# Altium PCB MZCAT_backlight_board.PcbDoc
Units mm, origin at the board's own origin, x right, y up, seen from the top; angles counter-clockwise.
Board outline 35.08 x 126.7 mm, 2 copper layers (Top Layer, Bottom Layer); 51 components, 30 nets, 163 pads, 5 vias.
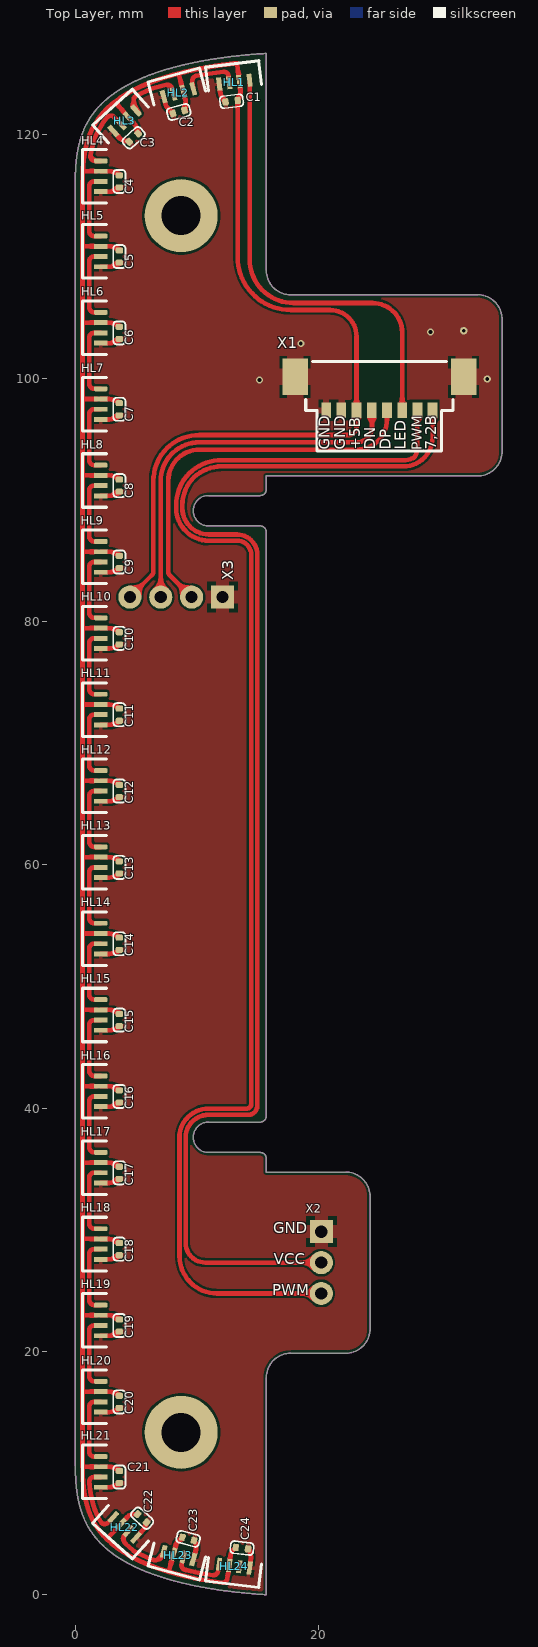
[diagram p0: Top Layer view]
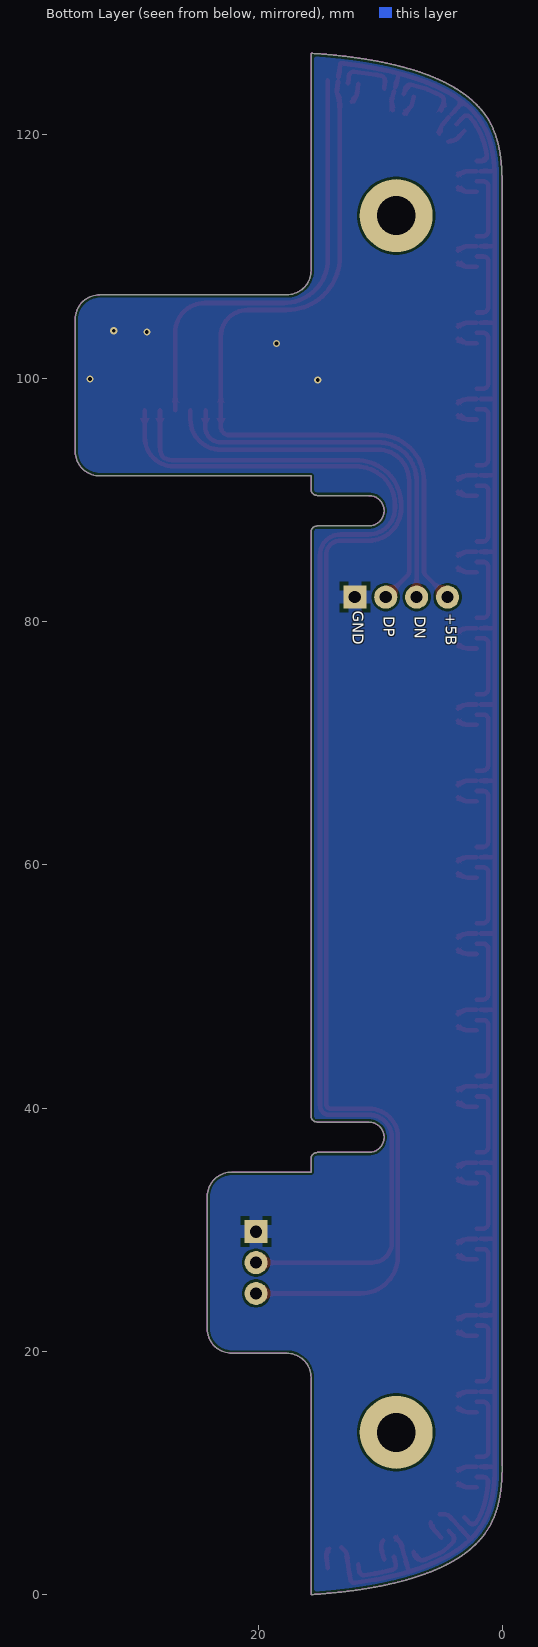
[diagram p1: Bottom Layer view, seen from below]
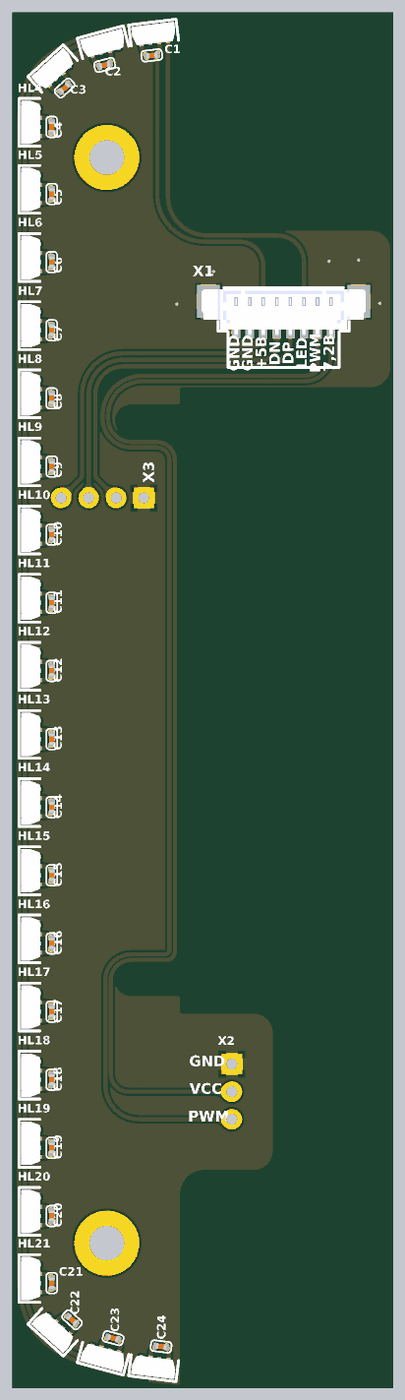
[diagram p2: 3D render of the assembled board from above, using the file's embedded part models]

## Layer stack, top to bottom
Top Solder: solder mask 0.0102, Solder Resist, Dk 3.5
Top Layer: signal copper 0.0356
Dielectric 1: dielectric 0.32, FR-4, Dk 4.8
Bottom Layer: signal copper 0.0356
Bottom Solder: solder mask 0.0102, Solder Resist, Dk 3.5

## Board outline
676 vertices, not listed, extent 0.006,0.006 35.086,126.702

## Design rules (kind name [scope] priority, off if disabled: settings)
AcuteAngle min_acute_angle [OnCopper] p1: minimum=3.50000000000000E+0001 checktracksonly=FALSE // Минимальный угол между примитивами топологии
BoardOutlineClearance board_outline_clearance_std [NOT (OnLayer('Bottom Overlay') OR OnLayer('Top Overlay'))] p1: gap=0.25 ignorepadtopadclearanceinfootprint=FALSE except(0: Arc-SplitContinuation Track-SplitContinuation SMDPad-SplitContinuation THPad-SplitContinuation Via-SplitContinuation Fill-SplitContinuation Poly-SplitContinuation Region-SplitContinuation Text-SplitContinuation) // Отступ элементов топологии от края фрезеруемой печатной платы
Clearance Clearance_keepout [OnTopLayer OR OnBottomLayer vs OnLayer('Keep-Out Layer')] p1: gap=0.125 ignorepadtopadclearanceinfootprint=FALSE except(0.2: Arc-Fill Arc-Poly Track-Fill Track-Poly SMDPad-SMDPad SMDPad-Fill SMDPad-Poly THPad-Fill THPad-Poly Via-Fill Via-Poly Fill-Fill Fill-Poly Poly-Poly Poly-Region Poly-Text; 0.25: Arc-Hole Track-Hole SMDPad-Hole THPad-Hole Via-Hole Fill-Hole Poly-Hole Region-Hole Text-Hole; 0.4: Arc-Track Track-Track)
Clearance TOP_BOT_GND [InPolygonClass('TOP_BOT')] p2: gap=0.5 ignorepadtopadclearanceinfootprint=FALSE
Clearance REF_GND [InPolygonClass('REF_GND')] p3: gap=0.5 ignorepadtopadclearanceinfootprint=FALSE
Clearance clearance_outer_18um_std [OnTopLayer OR OnBottomLayer] p4: gap=0.125 ignorepadtopadclearanceinfootprint=FALSE except(0.2: Arc-Fill Arc-Poly Track-Fill Track-Poly SMDPad-Fill SMDPad-Poly THPad-Fill THPad-Poly Via-Fill Via-Poly Fill-Fill Fill-Poly Poly-Poly Poly-Region Poly-Text; 0.25: Arc-Hole Track-Hole THPad-Hole Via-Hole Fill-Hole Poly-Hole Region-Hole Text-Hole) // Зазоры на внешних слоях
Clearance clearance_inner_18um_std [NOT (OnTopLayer Or OnBottomLayer)] p5: gap=0.125 ignorepadtopadclearanceinfootprint=FALSE except(0.2: Arc-Fill Arc-Poly Track-Fill Track-Poly SMDPad-SMDPad SMDPad-Fill SMDPad-Poly THPad-Fill THPad-Poly Via-Fill Via-Poly Fill-Fill Fill-Poly Poly-Poly Poly-Region Poly-Text; 0.25: Arc-Hole Track-Hole SMDPad-Hole THPad-Hole Via-Hole Fill-Hole Poly-Hole Region-Hole Text-Hole) // Зазоры на внутренних слоях
ComponentClearance [All] p1: gap=0 collisioncheckmode=3 verticalgap=0 showdistances=FALSE
DiffPairsRouting diff_pairs_routing [All] p1: maxlimit=0.127 minlimit=0.127 mostfreqgap=0.127 toplayer_minwidth=0.143 toplayer_maxwidth=0.143 toplayer_prefwidth=0.143 bottomlayer_minwidth=0.143 bottomlayer_maxwidth=0.143 bottomlayer_prefwidth=0.143 impedanceprofiledriven=TRUE maxuncoupledlength=12.7 // Правила трассировки дифференциальных пар
HoleSize min_hole_size_std [IsPad] p1: absolutevalues=TRUE maxlimit=5.9 minlimit=0.5 maxpercent=80.000 minpercent=20.000 // Диаметр межслойного переходного отверстия
HoleSize min_hole_size_via_std [IsVia] p2: absolutevalues=TRUE maxlimit=5.9 minlimit=0.3 maxpercent=80.000 minpercent=20.000 // Минимальный диаметр монтажного отверстия
HoleToHoleClearance hole_to_hole_clearance_std [All] p1: gap=0.2 allowstackedmicrovias=FALSE // Минимальное расстояние между краями двух отверстий
MinimumAnnularRing min_via_ar_std [All] p1: minimumring=0.15 // Поясок площадки переходного отверстия (Annular ring VIA)
MinimumAnnularRing min_pad_ar_std [All] p2: minimumring=0.2 // Поясок монтажной контактной площадки (Annular ring PAD)
MinimumSolderMaskSliver min_solder_mask_bridge_std [All] p1: minsoldermaskwidth=0 // Мнимальная ширина масочного мостика
PlaneClearance plane_clearance_18um_std [All] p1: clearance=0.2 // Отступ полигона (для слоя plane) от элементов топологии
PlaneConnect [All] p1: planeconnectstyle=Relief reliefexpansion=0.5 reliefentries=4 reliefconductorwidth=0.2 reliefairgap=0.2
PolygonConnect poly_connect_to_pad<=0.3 [(AsMM(PadXSize_AllLayers)<=0.301) or (AsMM(PadYSize_AllLayers)<=0.301)] p1: thpad.connectstyle=Relief thpad.reliefconductorwidth=0.2 thpad.reliefentries=4 thpad.polygonreliefangle="90 Angle" thpad.airgapwidth=0.2 smdpad.connectstyle=Relief smdpad.reliefconductorwidth=0.2 smdpad.reliefentries=4 smdpad.polygonreliefangle="90 Angle" smdpad.airgapwidth=0.2 via.connectstyle=Direct via.reliefconductorwidth=0.254 via.reliefentries=4 via.polygonreliefangle="90 Angle" via.airgapwidth=0.254 // Правила подключения полигонов для падов от 0,3мм и меньше
PolygonConnect poly_connect_to_pad<=0.4 [(AsMM(PadXSize_AllLayers)<=0.401) or (AsMM(PadYSize_AllLayers)<=0.401)] p2: thpad.connectstyle=Relief thpad.reliefconductorwidth=0.26 thpad.reliefentries=4 thpad.polygonreliefangle="90 Angle" thpad.airgapwidth=0.2 smdpad.connectstyle=Relief smdpad.reliefconductorwidth=0.26 smdpad.reliefentries=4 smdpad.polygonreliefangle="90 Angle" smdpad.airgapwidth=0.2 via.connectstyle=Direct via.reliefconductorwidth=0.254 via.reliefentries=4 via.polygonreliefangle="90 Angle" via.airgapwidth=0.254 // Правила подключения полигонов для падов от 0,4 и меньше
PolygonConnect poly_connect_to_pad<=0.6 [(AsMM(PadXSize_AllLayers)<=0.601) or (AsMM(PadYSize_AllLayers)<=0.601)] p3: thpad.connectstyle=Relief thpad.reliefconductorwidth=0.33 thpad.reliefentries=4 thpad.polygonreliefangle="90 Angle" thpad.airgapwidth=0.2 smdpad.connectstyle=Relief smdpad.reliefconductorwidth=0.33 smdpad.reliefentries=4 smdpad.polygonreliefangle="90 Angle" smdpad.airgapwidth=0.2 via.connectstyle=Direct via.reliefconductorwidth=0.254 via.reliefentries=4 via.polygonreliefangle="90 Angle" via.airgapwidth=0.254 // Правила подключения полигонов для падов от 0,6мм и меньше
PolygonConnect poly_connect_to_pad<=0.7 [(AsMM(PadXSize_AllLayers)<=0.701) or (AsMM(PadYSize_AllLayers)<=0.701)] p4: thpad.connectstyle=Relief thpad.reliefconductorwidth=0.46 thpad.reliefentries=4 thpad.polygonreliefangle="90 Angle" thpad.airgapwidth=0.2 smdpad.connectstyle=Relief smdpad.reliefconductorwidth=0.46 smdpad.reliefentries=4 smdpad.polygonreliefangle="90 Angle" smdpad.airgapwidth=0.2 via.connectstyle=Direct via.reliefconductorwidth=0.254 via.reliefentries=4 via.polygonreliefangle="90 Angle" via.airgapwidth=0.254 // Правила подключения полигонов для падов от 0,7мм и меньше
PolygonConnect poly_connect_to_pad<=0.8 [(AsMM(PadXSize_AllLayers)<=0.8)or(AsMM(PadYSize_AllLayers)<=0.8)] p5: thpad.connectstyle=Relief thpad.reliefconductorwidth=0.53 thpad.reliefentries=4 thpad.polygonreliefangle="90 Angle" thpad.airgapwidth=0.3 smdpad.connectstyle=Relief smdpad.reliefconductorwidth=0.53 smdpad.reliefentries=4 smdpad.polygonreliefangle="90 Angle" smdpad.airgapwidth=0.2 via.connectstyle=Direct via.reliefconductorwidth=0.254 via.reliefentries=4 via.polygonreliefangle="90 Angle" via.airgapwidth=0.254 // Правила подключения полигонов для падов от 0,8мм и меньше
PolygonConnect poly_connect_to_pad<=1 [(AsMM(PadXSize_AllLayers)<=1.01)or(AsMM(PadYSize_AllLayers)<=1.01)] p6: thpad.connectstyle=Relief thpad.reliefconductorwidth=0.6 thpad.reliefentries=4 thpad.polygonreliefangle="90 Angle" thpad.airgapwidth=0.3 smdpad.connectstyle=Relief smdpad.reliefconductorwidth=0.6 smdpad.reliefentries=4 smdpad.polygonreliefangle="90 Angle" smdpad.airgapwidth=0.2 via.connectstyle=Direct via.reliefconductorwidth=0.254 via.reliefentries=4 via.polygonreliefangle="90 Angle" via.airgapwidth=0.254 // Правила подключения полигонов для падов от 1мм и меньше
PolygonConnect poly_connect_to_pad<=1.3 [(AsMM(PadXSize_AllLayers)<=1.31)or(AsMM(PadYSize_AllLayers)<=1.31)] p7: thpad.connectstyle=Relief thpad.reliefconductorwidth=0.66 thpad.reliefentries=4 thpad.polygonreliefangle="90 Angle" thpad.airgapwidth=0.3 smdpad.connectstyle=Relief smdpad.reliefconductorwidth=0.86 smdpad.reliefentries=4 smdpad.polygonreliefangle="90 Angle" smdpad.airgapwidth=0.2 via.connectstyle=Direct via.reliefconductorwidth=0.254 via.reliefentries=4 via.polygonreliefangle="90 Angle" via.airgapwidth=0.254 // Правила подключения полигонов для падов от 1,3мм и меньше
PolygonConnect poly_connect_to_pad<=1.6 [(AsMM(PadXSize_AllLayers)<=1.61)or(AsMM(PadYSize_AllLayers)<=1.61)] p8: thpad.connectstyle=Relief thpad.reliefconductorwidth=0.8 thpad.reliefentries=4 thpad.polygonreliefangle="90 Angle" thpad.airgapwidth=0.3 smdpad.connectstyle=Relief smdpad.reliefconductorwidth=1 smdpad.reliefentries=4 smdpad.polygonreliefangle="90 Angle" smdpad.airgapwidth=0.2 via.connectstyle=Direct via.reliefconductorwidth=0.254 via.reliefentries=4 via.polygonreliefangle="90 Angle" via.airgapwidth=0.254 // Правила подключения полигонов для падов от 1,6мм и меньше
PolygonConnect poly_connect_to_pad<=1.8 [(AsMM(PadXSize_AllLayers)<=1.8)or(AsMM(PadYSize_AllLayers)<=1.8)] p9: thpad.connectstyle=Relief thpad.reliefconductorwidth=1 thpad.reliefentries=4 thpad.polygonreliefangle="90 Angle" thpad.airgapwidth=0.3 smdpad.connectstyle=Relief smdpad.reliefconductorwidth=1.2 smdpad.reliefentries=4 smdpad.polygonreliefangle="90 Angle" smdpad.airgapwidth=0.2 via.connectstyle=Direct via.reliefconductorwidth=0.254 via.reliefentries=4 via.polygonreliefangle="90 Angle" via.airgapwidth=0.254 // Правила подключения полигонов для падов от 1,8мм и меньше
PolygonConnect poly_connect_to_pad<=2 [(AsMM(PadXSize_AllLayers)<=2.01)or(AsMM(PadYSize_AllLayers)<=2.01)] p10: thpad.connectstyle=Relief thpad.reliefconductorwidth=1.1 thpad.reliefentries=4 thpad.polygonreliefangle="90 Angle" thpad.airgapwidth=0.3 smdpad.connectstyle=Relief smdpad.reliefconductorwidth=1.4 smdpad.reliefentries=4 smdpad.polygonreliefangle="90 Angle" smdpad.airgapwidth=0.2 via.connectstyle=Direct via.reliefconductorwidth=0.254 via.reliefentries=4 via.polygonreliefangle="90 Angle" via.airgapwidth=0.254 // Правила подключения полигонов для падов от 2мм и меньше
PolygonConnect poly_connect_to_pad<=2.3 [(AsMM(PadXSize_AllLayers)<=2.31)or(AsMM(PadYSize_AllLayers)<=2.31)] p11: thpad.connectstyle=Relief thpad.reliefconductorwidth=1.2 thpad.reliefentries=4 thpad.polygonreliefangle="90 Angle" thpad.airgapwidth=0.3 smdpad.connectstyle=Relief smdpad.reliefconductorwidth=1.4 smdpad.reliefentries=4 smdpad.polygonreliefangle="90 Angle" smdpad.airgapwidth=0.2 via.connectstyle=Direct via.reliefconductorwidth=0.254 via.reliefentries=4 via.polygonreliefangle="90 Angle" via.airgapwidth=0.254 // Правила подключения полигонов для падов от 2,3мм и меньше
PolygonConnect poly_connect_to_pad<=2.5 [(AsMM(PadXSize_AllLayers)<=2.51)or(AsMM(PadYSize_AllLayers)<=2.51)] p12: thpad.connectstyle=Relief thpad.reliefconductorwidth=1.2 thpad.reliefentries=4 thpad.polygonreliefangle="90 Angle" thpad.airgapwidth=0.3 smdpad.connectstyle=Relief smdpad.reliefconductorwidth=1.4 smdpad.reliefentries=4 smdpad.polygonreliefangle="90 Angle" smdpad.airgapwidth=0.2 via.connectstyle=Direct via.reliefconductorwidth=0.254 via.reliefentries=4 via.polygonreliefangle="90 Angle" via.airgapwidth=0.254 // Правила подключения полигонов для падов от 2,5мм и меньше
PolygonConnect poly_connect_to_pad<=2.7 [(AsMM(PadXSize_AllLayers)<=2.71)or(AsMM(PadYSize_AllLayers)<=2.71)] p13: thpad.connectstyle=Relief thpad.reliefconductorwidth=1.4 thpad.reliefentries=4 thpad.polygonreliefangle="90 Angle" thpad.airgapwidth=0.3 smdpad.connectstyle=Relief smdpad.reliefconductorwidth=1.6 smdpad.reliefentries=4 smdpad.polygonreliefangle="90 Angle" smdpad.airgapwidth=0.2 via.connectstyle=Direct via.reliefconductorwidth=0.254 via.reliefentries=4 via.polygonreliefangle="90 Angle" via.airgapwidth=0.254 // Правила подключения полигонов для падов от 2,7мм и меньше
PolygonConnect poly_connect_to_pad<=3 [(AsMM(PadXSize_AllLayers)<=3.01)or(AsMM(PadYSize_AllLayers)<=3.01)] p14: thpad.connectstyle=Relief thpad.reliefconductorwidth=1.6 thpad.reliefentries=4 thpad.polygonreliefangle="90 Angle" thpad.airgapwidth=0.3 smdpad.connectstyle=Relief smdpad.reliefconductorwidth=1.8 smdpad.reliefentries=4 smdpad.polygonreliefangle="90 Angle" smdpad.airgapwidth=0.2 via.connectstyle=Direct via.reliefconductorwidth=0.254 via.reliefentries=4 via.polygonreliefangle="90 Angle" via.airgapwidth=0.254 // Правила подключения полигонов для падов от 3мм и меньше
PolygonConnect poly_connect_to_pad<=7 [(AsMM(PadXSize_AllLayers)<7.01)or(AsMM(PadYSize_AllLayers)<=7.01)] p15: thpad.connectstyle=Relief thpad.reliefconductorwidth=2 thpad.reliefentries=4 thpad.polygonreliefangle="90 Angle" thpad.airgapwidth=0.4 smdpad.connectstyle=Relief smdpad.reliefconductorwidth=2 smdpad.reliefentries=4 smdpad.polygonreliefangle="90 Angle" smdpad.airgapwidth=0.3 via.connectstyle=Direct via.reliefconductorwidth=0.254 via.reliefentries=4 via.polygonreliefangle="90 Angle" via.airgapwidth=0.254 // Правила подключения полигонов для падов от 7мм и меньше
PolygonConnect poly_connect_to_pad [All] p16: thpad.connectstyle=Relief thpad.reliefconductorwidth=0.25 thpad.reliefentries=4 thpad.polygonreliefangle="90 Angle" thpad.airgapwidth=0.2 smdpad.connectstyle=Relief smdpad.reliefconductorwidth=0.25 smdpad.reliefentries=4 smdpad.polygonreliefangle="90 Angle" smdpad.airgapwidth=0.2 via.connectstyle=Direct via.reliefconductorwidth=0.25 via.reliefentries=4 via.polygonreliefangle="90 Angle" via.airgapwidth=0.2 // Правила подключения полигонов общие
RoutingCorners [All] p1 off: cornerstyle=45-Degree minsetback=2.5 maxsetback=2.5
RoutingVias [All] p1: holewidth=0.3 width=0.6 viastyle="Through Hole" minholewidth=0.3 minwidth=0.6 maxholewidth=5.9 maxwidth=6.4
SilkToSilkClearance silk_to_silk_clearance_std [All] p1 off: silktosilkclearance=0.15 // Отступ текста шелкографии от других примитивов шелкографии
SilkToSolderMaskClearance silk_to_solder_mask_clearance_std [IsPad] p1 off: minsilkscreentomaskgap=0.15 clearancetoexposedcopper=FALSE // Минимальное расстояние между элементами шелкографии и вскрытой медью
SolderMaskExpansion solder_mask_expansion_std [All] p1: expansion=0.05 istentingtop=FALSE // Припуск паяльной масски
SupplyNets "Schematic Supply Nets_2" [InNet('+7,2В')] p1: voltage=0.000
SupplyNets "Schematic Supply Nets_1" [InNet('GND')] p2: voltage=0.000
SupplyNets "Schematic Supply Nets" [InNet('+5В')] p3: voltage=0.000
UnRoutedNet [All] p1: checkbadconnections=TRUE
Width width_18um_std [All] p1: maxlimit=10 minlimit=0.125 preferedwidth=0.15 checkconnectedcopper=TRUE // Ширина проводников (общая)
19 further rules are at their usual default settings.

## Components (designator, comment, footprint, x,y, rotation, side; value= is the part's Value field where it differs from the comment)
HL1 "WS2812B" "ws2812b 4020" 13.081,124.333 r277 top
HL2 "WS2812B" "ws2812b 4020" 8.484,123.462 r285 top
HL3 "WS2812B" "ws2812b 4020" 4.064,121.158 r312 top
HL4 "WS2812B" "ws2812b 4020" 2.1,116.592 r0 top
HL5 "WS2812B" "ws2812b 4020" 2.1,110.416 r0 top
HL6 "WS2812B" "ws2812b 4020" 2.1,104.14 r0 top
HL7 "WS2812B" "ws2812b 4020" 2.1,97.864 r0 top
HL8 "WS2812B" "ws2812b 4020" 2.1,91.588 r0 top
HL9 "WS2812B" "ws2812b 4020" 2.1,85.312 r0 top
HL10 "WS2812B" "ws2812b 4020" 2.1,79.036 r0 top
HL11 "WS2812B" "ws2812b 4020" 2.1,72.76 r0 top
HL12 "WS2812B" "ws2812b 4020" 2.1,66.484 r0 top
HL13 "WS2812B" "ws2812b 4020" 2.1,60.208 r0 top
HL14 "WS2812B" "ws2812b 4020" 2.1,53.932 r0 top
HL15 "WS2812B" "ws2812b 4020" 2.1,47.656 r0 top
HL16 "WS2812B" "ws2812b 4020" 2.1,41.38 r0 top
HL17 "WS2812B" "ws2812b 4020" 2.1,35.104 r0 top
HL18 "WS2812B" "ws2812b 4020" 2.1,28.828 r0 top
HL19 "WS2812B" "ws2812b 4020" 2.1,22.552 r0 top
HL20 "WS2812B" "ws2812b 4020" 2.1,16.276 r0 top
HL21 "WS2812B" "ws2812b 4020" 2.1,10.1 r0 top
HL22 "WS2812B" "ws2812b 4020" 4.064,5.534 r48 top
HL23 "WS2812B" "ws2812b 4020" 8.484,3.23 r75 top
HL24 "WS2812B" "ws2812b 4020" 13.081,2.359 r83 top
X1 "PicoBlade-8" "PicoBlade-8 SMD" 25,97.355 r180 top
X2 "PLS 1 x 3" "PLS_1x3 - emty" 20.228,24.765 r180 top
X3 "DS1021-1x4" "PLS_1x4 - emty" 4.49,82 r90 top
С1 "0,1мк" C0402 12.35,122.725 r7 top
С2 "0,1мк" C0402 8.02,121.769 r15 top
С3 "0,1мк" C0402 4.418,119.446 r42 top
С4 "0,1мк" C0402 3.605,115.672 r90 top
С5 "0,1мк" C0402 3.605,109.496 r90 top
С6 "0,1мк" C0402 3.605,103.22 r90 top
С7 "0,1мк" C0402 3.605,96.944 r90 top
С8 "0,1мк" C0402 3.605,90.668 r90 top
С9 "0,1мк" C0402 3.605,84.392 r90 top
С10 "0,1мк" C0402 3.605,78.116 r90 top
С11 "0,1мк" C0402 3.605,71.84 r90 top
С12 "0,1мк" C0402 3.605,65.564 r90 top
С13 "0,1мк" C0402 3.605,59.288 r90 top
С14 "0,1мк" C0402 3.605,53.012 r90 top
С15 "0,1мк" C0402 3.605,46.736 r90 top
С16 "0,1мк" C0402 3.605,40.46 r90 top
С17 "0,1мк" C0402 3.605,34.184 r90 top
С18 "0,1мк" C0402 3.605,27.908 r90 top
С19 "0,1мк" C0402 3.605,21.632 r90 top
С20 "0,1мк" C0402 3.605,15.356 r90 top
С21 "0,1мк" C0402 3.605,9.18 r90 top
С22 "0,1мк" C0402 5.855,5.941 r138 top
С23 "0,1мк" C0402 9.761,4.447 r165 top
С24 "0,1мк" C0402 14.2,3.75 r173 top

## Footprints (in the part's own frame and the unit in brackets; to place one, negate y for a bottom-side part, rotate by r counter-clockwise, add the part's x,y. Pads: shape width x height; smd on the part's side, far side on the other; paste and mask are expansions set on the pad)
C0402 [mm]
  rrect50% 0.5x0.6 smd: 1(0,-0.02) 2(1,-0.02)
  silkscreen extent -0.45,-0.53 1.45,0.48, body extent 0,-0.28 1,0.22, height 0.5
"PicoBlade-8 SMD" [mm]
  rect 2.1x3 smd: 0(-6.925,-2.75) 0(6.925,-2.75)
  rect 0.8x1.3 smd: 1(4.375,0) 2(3.125,0) 3(1.875,0) 4(0.625,0) 5(-0.625,0) 6(-1.875,0) 7(-3.125,0) 8(-4.375,0)
  silkscreen extent -6.05,-4 6.05,0, body extent -7.57,-3.85 7.57,0.35, height 4.7
"PLS_1x3 - emty" [mm]
  round 1.9 hole 1: 1(0,0) 2(0,-2.54)
  rect 1.9x1.9 hole 1: 3(0,-5.08)
"PLS_1x4 - emty" [mm]
  round 1.9 hole 1: 1(0,0) 2(0,-2.54) 3(0,-5.08)
  rect 1.9x1.9 hole 1: 4(0,-7.62)
"ws2812b 4020" [mm] "ws2812b led in 4020 case"
  rrect50% 1.09x0.4 smd: 1(0,1.26)
  rect 1.09x0.4 smd: 2(0,0.42) 3(0,-0.42) 4(0,-1.26)
  silkscreen extent -1.5,-2.2 0.45,2.2, body extent -1.3,-2 0.45,2, height 2

## Part data
HL1 HL2 HL3 HL4 HL5 HL6 HL7 HL8 HL9 HL10 HL11 HL12 HL13 HL14 HL15 HL16 HL17 HL18 HL19 HL20 HL21 HL22 HL23 HL24: "адресный светодиод на микросхеме WS2812b", Name=WS2812B
X1: library part Header_8, "Разъем - 8 конт. мама", Contact_1=GND, Contact_2=GND, Contact_3=+5В, Contact_4=DN, Contact_5=DP, Contact_6=LED_DATA, Contact_7=SERVO_DATA, Contact_8=+7,2В, Name=PicoBlade-8
X3: library part "PLS 1 x 4", Contact_1=+5В, Contact_2=DN, Contact_3=DP, Contact_4=GND, Name=DS1021-1x4
С1 С2 С3 С4 С5 С6 С7 С8 С9 С10 С11 С12 С13 С14 С15 С16 С17 С18 С19 С20 С21 С22 С23 С24: library part "Кер. конденсатор"
X2: Contact_1=VDD, Contact_2=GND, Contact_3=DATA, Name="PLS 1 x 3"

## Free pads (board coordinates)
  round 6 hole 3.2: 0(8.706,13.354) 0(8.706,113.354)

## Via types
v1: diameter 0.6, hole 0.3, Top Layer to Bottom Layer, tented both sides, 5 vias

## Nets (pads, with @x,y where several pads share a name; then routed paths per layer and width w, separated by ;. In a path a pad name is that pad's centre, name@x,y a point inside that pad or via, vN(x,y) a via of type N, cw(c..) or ccw(c..) an arc to the next point about the centre after c; other vN are vias at no path point)
+5В: HL1.2 HL2.2 HL3.2 HL4.2 HL5.2 HL6.2 HL7.2 HL8.2 HL9.2 HL10.2 HL11.2 HL12.2 HL13.2 HL14.2 HL15.2 HL16.2 HL17.2 HL18.2 HL19.2 HL20.2 HL21.2 HL22.2 HL23.2 HL24.2 X1.3 X3.1 С1.2 С2.2 С3.2 С4.2 С5.2 С6.2 С7.2 С8.2 С9.2 С10.2 С11.2 С12.2 С13.2 С14.2 С15.2 С16.2 С17.2 С18.2 С19.2 С20.2 С21.2 С22.2 С23.2 С24.2 | length 271.5
  Top Layer w0.381: 0.612,10.521 HL21.2@1.746,10.521 ; 0.612,16.697 HL20.2@1.746,16.697 ; 0.612,22.973 HL19.2@1.746,22.973 ; 0.612,29.249 HL18.2@1.746,29.249 ; 0.612,35.525 HL17.2@1.746,35.525 ; 0.612,41.801 HL16.2@1.746,41.801 ; 0.612,48.077 HL15.2@1.746,48.077 ; 0.612,54.353 HL14.2@1.746,54.353 ; 0.612,60.629 HL13.2@1.746,60.629 ; 0.612,66.905 HL12.2@1.746,66.905 ; 0.612,73.181 HL11.2@1.746,73.181 ; 0.612,79.457 HL10.2@1.746,79.457 ; 0.612,85.733 HL9.2@1.746,85.733 ; 0.612,92.009 HL8.2@1.746,92.009 ; 0.612,98.285 HL7.2@1.746,98.285 ; 0.612,104.561 HL6.2@1.746,104.561 ; 0.612,110.837 HL5.2@1.746,110.837 ; 0.649,117.43 0.647,117.398 0.644,117.364 0.642,117.331 0.64,117.297 0.637,117.263 0.635,117.229 0.633,117.195 0.631,117.162 0.629,117.127 0.627,117.093 0.626,117.059 0.624,117.025 0.623,117.013 ; 0.649,117.431 0.652,117.464 0.655,117.497 0.657,117.53 0.66,117.563 0.664,117.604 0.667,117.645 0.671,117.686 0.674,117.718 ; 0.674,117.718 0.678,117.75 0.681,117.783 cw(c1.06,117.743) 0.681,117.784 0.684,117.815 0.688,117.847 0.691,117.879 0.696,117.919 0.701,117.959 0.705,117.998 0.71,118.038 0.715,118.077 0.72,118.116 ; 0.72,118.116 0.725,118.151 cw(c1.103,118.103) 0.726,118.155 0.731,118.193 0.737,118.232 0.742,118.27 0.748,118.308 0.754,118.347 0.76,118.384 0.766,118.422 0.772,118.46 0.779,118.497 0.785,118.534 ; 0.785,118.535 0.792,118.571 0.798,118.605 cw(c1.173,118.539) 0.798,118.609 0.807,118.652 0.815,118.696 0.824,118.74 0.832,118.783 ; 0.832,118.784 0.841,118.826 cw(c1.214,118.749) 0.842,118.83 0.85,118.869 0.86,118.912 0.869,118.955 0.879,118.997 ; 0.847,7.853 0.856,7.81 ; 0.847,7.853 0.838,7.896 0.829,7.939 0.821,7.983 0.814,8.019 0.807,8.056 0.8,8.092 0.793,8.129 0.786,8.166 0.78,8.203 0.773,8.241 0.767,8.278 0.761,8.316 0.755,8.354 0.749,8.392 0.743,8.43 0.738,8.469 0.732,8.507 0.727,8.546 0.722,8.585 0.716,8.624 0.711,8.663 0.706,8.702 0.702,8.742 0.697,8.781 0.692,8.821 0.689,8.853 0.685,8.885 0.682,8.917 0.679,8.949 0.675,8.982 0.672,9.014 0.669,9.047 0.666,9.079 0.663,9.112 0.66,9.145 0.657,9.178 0.655,9.211 0.652,9.244 0.649,9.277 0.647,9.311 0.644,9.344 0.642,9.378 0.64,9.411 0.637,9.445 0.635,9.479 0.633,9.513 0.631,9.547 0.629,9.581 0.627,9.615 0.626,9.649 0.624,9.684 0.622,9.718 0.621,9.753 0.619,9.787 0.618,9.822 0.616,9.857 0.616,9.883 0.615,9.909 0.614,9.936 0.613,9.962 0.612,9.988 0.611,10.015 0.61,10.041 0.61,10.068 0.609,10.094 0.608,10.121 0.608,10.148 0.607,10.174 0.607,10.201 0.606,10.228 0.606,10.255 0.605,10.282 0.605,10.309 0.605,10.336 0.604,10.363 0.604,10.39 0.604,10.417 0.604,10.445 0.604,10.472 0.603,10.499 0.603,10.526 0.603,10.554 0.603,10.591 0.603,48.077 0.603,73.181 0.603,116.127 0.603,116.154 0.603,116.182 0.603,116.209 0.604,116.236 0.604,116.264 0.604,116.291 0.604,116.318 0.604,116.345 0.605,116.372 0.605,116.399 0.605,116.426 0.606,116.453 0.606,116.48 0.607,116.507 0.607,116.534 0.608,116.56 0.608,116.587 0.609,116.614 0.61,116.64 0.61,116.667 0.611,116.693 0.612,116.721 0.613,116.746 0.614,116.773 0.615,116.799 0.616,116.825 0.616,116.851 0.618,116.886 0.619,116.921 0.621,116.955 0.622,116.99 0.623,117.013 ; 0.857,7.81 0.866,7.768 0.876,7.725 0.885,7.683 0.895,7.641 0.905,7.6 0.916,7.558 0.926,7.517 0.937,7.476 0.947,7.435 0.958,7.395 0.97,7.354 0.981,7.315 0.994,7.269 1.008,7.221 1.022,7.176 1.036,7.13 1.053,7.079 1.069,7.027 1.084,6.982 1.1,6.938 1.117,6.888 1.135,6.838 1.154,6.788 1.175,6.732 1.196,6.678 1.22,6.617 1.247,6.551 1.275,6.485 1.306,6.414 1.344,6.333 1.362,6.293 1.552,5.926 ccw(c1.891,6.101) 1.558,5.915 ccw(c6.633,8.78) 1.697,5.682 ccw(c6.633,8.78) 1.857,5.44 2.043,5.189 ccw(c2.349,5.416) 2.049,5.182 2.053,5.176 2.321,4.858 ccw(c2.612,5.104) 2.329,4.848 2.333,4.845 2.497,4.67 ccw(c2.775,4.931) 2.503,4.664 2.505,4.662 2.683,4.487 ccw(c2.95,4.759) 2.687,4.483 2.692,4.478 2.975,4.225 ccw(c3.229,4.509) 2.982,4.219 2.987,4.214 3.239,4.013 3.355,3.921 3.397,3.889 3.44,3.858 3.483,3.827 3.526,3.796 3.57,3.765 3.614,3.734 3.659,3.703 3.705,3.672 3.751,3.641 3.797,3.61 3.844,3.579 3.891,3.549 3.939,3.518 3.979,3.493 4.02,3.467 4.061,3.442 4.102,3.417 4.143,3.391 4.185,3.366 4.228,3.341 4.268,3.317 4.313,3.291 4.357,3.266 4.4,3.241 4.444,3.216 4.489,3.192 4.533,3.167 4.579,3.142 4.624,3.118 4.641,3.108 4.953,2.947 5,2.924 5.049,2.9 5.098,2.876 5.147,2.852 5.196,2.829 5.246,2.805 5.297,2.782 5.347,2.758 5.398,2.735 5.45,2.712 5.502,2.688 5.554,2.665 5.606,2.642 5.659,2.62 5.712,2.597 5.765,2.574 5.819,2.551 5.873,2.529 5.928,2.507 5.982,2.484 6.037,2.462 6.093,2.44 6.149,2.418 6.205,2.396 6.261,2.374 6.318,2.352 6.375,2.331 6.433,2.309 6.49,2.288 6.56,2.262 6.63,2.237 6.689,2.216 6.748,2.195 6.808,2.174 6.868,2.154 6.928,2.133 6.988,2.113 7.049,2.092 7.11,2.072 7.172,2.052 7.233,2.032 7.295,2.012 7.358,1.992 7.42,1.973 7.483,1.953 7.547,1.934 7.61,1.914 7.674,1.895 7.738,1.876 7.803,1.857 7.867,1.839 7.932,1.82 7.998,1.801 8.063,1.783 8.129,1.765 8.209,1.743 8.289,1.721 8.369,1.7 8.449,1.679 8.53,1.658 8.612,1.637 8.694,1.616 8.776,1.595 8.845,1.579 8.914,1.562 8.983,1.545 9.053,1.529 9.136,1.509 9.221,1.489 9.305,1.47 9.39,1.451 9.475,1.432 9.746,1.374 9.762,1.371 9.806,1.361 10.359,1.252 10.436,1.237 10.482,1.228 12.086,0.989 12.115,0.989 12.272,0.989 12.384,1.101 12.438,1.155 ccw(c11.505,1.586) 12.474,1.243 ccw(c11.505,1.586) 12.49,1.293 12.612,2.059 HL24.2 12.715,2.761 12.775,3.25 cw(c13.274,3.25) 12.921,3.603 С24.2 ; 0.879,118.997 0.889,119.039 0.899,119.081 0.909,119.122 ; 0.909,119.122 0.919,119.163 ; 0.919,119.164 0.929,119.205 0.94,119.245 ; 0.94,119.246 0.951,119.286 0.962,119.327 0.973,119.367 0.985,119.407 0.998,119.453 ; 0.998,119.454 1.012,119.499 1.026,119.545 1.042,119.597 1.059,119.648 cw(c1.421,119.531) 1.059,119.65 1.076,119.7 cw(c1.437,119.58) 1.076,119.701 1.091,119.744 1.108,119.794 cw(c1.468,119.669) 1.109,119.797 1.126,119.844 cw(c1.485,119.717) 1.127,119.847 1.144,119.895 ; 1.145,119.896 1.165,119.95 cw(c1.521,119.816) 1.166,119.952 1.186,120.005 cw(c1.541,119.868) 1.187,120.007 1.21,120.066 cw(c1.564,119.925) 1.211,120.068 1.237,120.132 cw(c1.59,119.988) 1.238,120.135 1.264,120.197 cw(c1.616,120.05) 1.266,120.201 1.293,120.263 cw(c1.642,120.11) 1.294,120.265 1.327,120.338 cw(c1.674,120.182) 1.329,120.343 1.368,120.426 cw(c1.712,120.264) 1.369,120.43 1.407,120.507 cw(c1.749,120.339) 1.408,120.51 1.451,120.594 1.911,121.344 cw(c6.691,117.887) 1.99,121.451 2.049,121.528 cw(c2.351,121.295) 2.053,121.532 2.107,121.6 cw(c2.405,121.362) 2.11,121.604 ; HL4.2@1.746,117.013 0.623,117.013 ; HL21.2 2.804,10.52 cw(c2.804,9.359) С21.2 ; HL20.2 2.804,16.696 cw(c2.804,15.535) С20.2 ; HL19.2 2.804,22.972 cw(c2.804,21.811) С19.2 ; HL18.2 2.804,29.248 cw(c2.804,28.087) С18.2 ; HL17.2 2.804,35.524 cw(c2.804,34.363) С17.2 ; HL16.2 2.804,41.8 cw(c2.804,40.639) С16.2 ; HL15.2 2.804,48.076 cw(c2.804,46.915) С15.2 ; HL14.2 2.804,54.352 cw(c2.804,53.191) С14.2 ; HL13.2 2.804,60.628 cw(c2.804,59.467) С13.2 ; HL12.2 2.804,66.904 cw(c2.804,65.743) С12.2 ; HL11.2 2.804,73.18 cw(c2.804,72.019) С11.2 ; HL10.2 2.804,79.456 cw(c2.804,78.295) С10.2 ; HL9.2 2.804,85.732 cw(c2.804,84.571) С9.2 ; HL8.2 2.804,92.008 cw(c2.804,90.847) С8.2 ; HL7.2 2.804,98.284 cw(c2.804,97.123) С7.2 ; HL6.2 2.804,104.56 cw(c2.804,103.399) С6.2 ; HL5.2 2.804,110.836 cw(c2.804,109.675) С5.2 ; HL4.2 2.804,117.012 cw(c2.804,115.851) С4.2 ; 2.11,121.604 2.171,121.678 ; 2.171,121.678 cw(c2.465,121.435) 2.173,121.681 ; 2.174,121.681 2.228,121.745 cw(c2.517,121.497) 2.23,121.747 ; 2.23,121.747 2.276,121.8 cw(c2.563,121.549) 2.279,121.803 2.331,121.861 cw(c2.614,121.607) 2.333,121.864 2.382,121.917 cw(c2.662,121.659) 2.384,121.92 2.429,121.968 cw(c2.707,121.707) 2.431,121.97 2.472,122.013 cw(c2.748,121.749) 2.475,122.015 2.517,122.059 cw(c2.789,121.792) 2.518,122.06 2.556,122.098 cw(c2.827,121.83) 2.559,122.1 2.597,122.138 cw(c2.865,121.867) 2.599,122.14 2.638,122.179 cw(c2.904,121.905) 2.64,122.18 2.68,122.218 cw(c2.943,121.943) 2.682,122.22 2.722,122.258 cw(c2.983,121.981) 2.724,122.26 2.768,122.299 2.988,122.495 cw(c3.241,122.21) 2.995,122.501 2.999,122.504 3.253,122.709 ; 2.602,4.567 2.605,4.57 ; 2.606,4.571 3.508,5.558 HL22.2 3.988,6.079 4.3,6.425 cw(c4.783,5.942) 4.783,6.625 С22.2 ; 3.644,122.995 3.6,122.963 3.253,122.709 ; 3.645,122.995 3.689,123.026 cw(c3.904,122.711) 3.691,123.027 3.734,123.056 cw(c3.948,122.741) 3.736,123.058 3.781,123.088 ; 3.782,123.088 3.827,123.118 cw(c4.037,122.8) 3.829,123.119 3.875,123.149 ; 3.876,123.15 3.922,123.18 cw(c4.128,122.859) 3.924,123.181 3.963,123.205 ; 3.963,123.206 4.003,123.231 4.044,123.256 4.084,123.281 4.128,123.308 4.168,123.331 cw(c4.364,123.005) 4.169,123.332 4.21,123.357 cw(c4.405,123.029) 4.211,123.357 4.252,123.382 cw(c4.446,123.054) 4.254,123.383 4.296,123.407 4.338,123.432 cw(c4.529,123.102) 4.34,123.433 4.382,123.457 cw(c4.571,123.126) 4.384,123.458 4.426,123.482 cw(c4.614,123.15) 4.427,123.482 4.47,123.506 cw(c4.656,123.174) 4.472,123.507 4.515,123.531 cw(c4.699,123.198) 4.516,123.532 4.56,123.556 cw(c4.743,123.222) 4.561,123.556 4.606,123.581 4.651,123.605 4.697,123.629 4.745,123.655 4.79,123.678 cw(c4.966,123.34) 4.791,123.679 4.837,123.702 4.884,123.726 cw(c5.057,123.387) 4.886,123.727 4.932,123.75 cw(c5.104,123.41) 4.933,123.751 4.98,123.774 cw(c5.15,123.434) 4.981,123.775 5.028,123.798 cw(c5.197,123.457) 5.03,123.799 ; HL3.2@4.146,121.709 3.253,122.709 ; HL3.2 4.614,121.176 4.917,120.839 ; X3.1 6.313,83.823 ccw(c6.044,84.093) 6.425,84.093 6.425,91.57 cw(c10.18,91.57) 10.18,95.325 22.436,95.325 ccw(c22.436,96.014) 23.125,96.014 X1.3 23.125,103.425 ccw(c20.95,103.425) 20.95,105.6 17.703,105.6 cw(c17.703,109.958) 13.345,109.958 С1.2 13.391,122.943 13.567,123.413 ccw(c13.21,123.547) 13.589,123.592 ; 4.918,120.838 cw(c4.634,120.584) 4.998,120.697 5.146,120.221 С3.2 ; 5.03,123.799 5.077,123.822 cw(c5.245,123.48) 5.079,123.823 5.126,123.846 cw(c5.292,123.503) 5.128,123.847 5.137,123.851 5.176,123.87 cw(c5.34,123.526) 5.177,123.87 5.226,123.894 5.276,123.917 cw(c5.438,123.572) 5.277,123.918 5.326,123.94 cw(c5.487,123.595) 5.328,123.941 5.377,123.964 cw(c5.536,123.617) 5.379,123.964 5.429,123.987 cw(c5.586,123.64) 5.43,123.988 5.48,124.01 ; 5.481,124.011 5.532,124.033 ; 5.533,124.034 5.584,124.056 cw(c5.738,123.708) 5.586,124.057 5.637,124.079 cw(c5.789,123.73) 5.638,124.08 5.689,124.102 cw(c5.841,123.752) 5.692,124.103 5.743,124.125 cw(c5.893,123.774) 5.744,124.125 5.797,124.147 cw(c5.945,123.796) 5.798,124.148 5.851,124.17 ; 5.852,124.17 5.906,124.193 5.96,124.215 cw(c6.104,123.862) 5.961,124.215 6.015,124.237 cw(c6.158,123.884) 6.016,124.238 6.07,124.259 cw(c6.212,123.905) 6.071,124.26 6.126,124.281 cw(c6.266,123.927) 6.127,124.282 6.182,124.303 cw(c6.321,123.948) 6.183,124.304 6.239,124.325 6.295,124.347 cw(c6.431,123.991) 6.296,124.347 6.352,124.368 cw(c6.487,124.012) 6.353,124.369 6.409,124.39 6.467,124.411 cw(c6.599,124.054) 6.468,124.412 6.524,124.433 cw(c6.656,124.075) 6.526,124.433 6.595,124.458 cw(c6.725,124.1) 6.596,124.459 6.653,124.479 cw(c6.782,124.121) 6.654,124.48 6.712,124.5 ; 6.713,124.501 6.772,124.521 6.832,124.542 6.891,124.563 ; 6.892,124.563 6.951,124.583 ; 6.953,124.583 7.012,124.603 ; 7.013,124.604 7.073,124.624 ; 7.074,124.624 7.134,124.644 7.196,124.664 ; 7.197,124.664 7.258,124.684 ; 7.259,124.684 7.32,124.704 7.382,124.724 ; 7.383,124.724 7.445,124.743 ; 7.446,124.743 7.508,124.763 ; 7.509,124.763 7.572,124.782 7.635,124.801 ; 7.636,124.801 7.699,124.82 ; 7.67,1.898 7.977,2.999 HL23.2 8.168,3.682 8.3,4.175 cw(c8.421,4.175) 8.335,4.26 С23.2 ; 7.7,124.821 7.763,124.839 ; 7.764,124.84 7.828,124.858 ; 7.829,124.858 7.893,124.877 ; 7.894,124.877 7.958,124.896 ; 7.959,124.896 8.023,124.914 ; 8.024,124.914 8.089,124.932 ; 8.09,124.933 8.155,124.951 ; 8.156,124.951 8.221,124.969 ; 8.222,124.969 8.301,124.99 cw(c8.401,124.622) 8.302,124.991 8.382,125.012 ; 8.383,125.012 8.462,125.033 cw(c8.559,124.664) 8.464,125.033 8.543,125.054 ; 8.51,124.982 HL2.2@8.796,123.913 ; 8.545,125.054 8.625,125.075 ; 8.626,125.075 8.707,125.095 ; 8.708,125.096 8.776,125.113 8.844,125.129 ; 8.845,125.13 8.913,125.146 ; HL2.2 8.979,123.228 9.08,122.85 ; 8.914,125.146 8.983,125.163 ; 8.984,125.163 9.052,125.179 ; С2.2 9.02,122.13 9.09,122.706 ccw(c8.712,122.752) 9.08,122.849 ; 9.053,125.18 9.122,125.196 9.206,125.215 ; 9.207,125.216 9.29,125.235 ; 9.292,125.235 9.375,125.254 ; 9.376,125.254 9.461,125.273 9.532,125.288 ; 9.533,125.289 9.604,125.304 ; 9.604,125.304 9.675,125.319 ; 9.676,125.319 9.747,125.334 ; 9.748,125.335 9.819,125.35 ; 9.82,125.35 9.892,125.365 ; 9.893,125.365 9.964,125.379 ; 9.965,125.38 10.052,125.397 ; 10.053,125.397 10.14,125.414 ; 10.141,125.415 10.228,125.432 10.317,125.449 ; 10.317,125.449 10.405,125.465 ; 10.406,125.466 10.494,125.482 ; 10.495,125.482 10.584,125.499 cw(c10.653,125.124) 10.585,125.499 10.674,125.515 ; 10.674,125.515 10.763,125.531 ; 10.764,125.531 10.854,125.547 ; 10.855,125.547 10.944,125.562 11.035,125.578 ; 11.036,125.578 11.126,125.593 ; 11.127,125.593 11.218,125.608 ; 11.219,125.608 11.309,125.623 ; 11.31,125.623 11.401,125.638 ; 11.402,125.638 11.493,125.652 ; 11.494,125.652 11.586,125.667 11.678,125.681 11.771,125.695 11.864,125.708 ; 11.865,125.709 11.958,125.722 12.051,125.735 ; 12.052,125.735 12.145,125.748 ; 12.146,125.749 12.239,125.761 ; 12.24,125.761 12.334,125.774 ; 12.334,125.774 12.428,125.787 ; 12.429,125.787 12.523,125.799 ; 12.524,125.799 12.618,125.811 ; 12.618,125.811 12.713,125.823 ; 12.713,125.823 12.808,125.835 ; 12.809,125.835 12.903,125.847 ; 12.904,125.847 12.999,125.858 ; 13,125.858 13.095,125.869 13.207,125.882 ; 13.208,125.882 13.319,125.895 ; 13.321,125.784 HL1.2@13.45,124.735 ; HL1.2 13.535,124.032 13.589,123.593
+7,2В: X1.8 X2.2 | length 108
  Top Layer w0.381: X2.2 10.697,27.305 cw(c10.697,28.927) 9.075,28.927 9.075,37.781 cw(c9.456,37.779) 9.079,37.834 9.079,37.836 cw(c10.956,37.553) 10.956,39.451 14.308,39.451 ccw(c14.307,39.832) 14.431,39.472 ccw(c14.165,40.237) 14.975,40.237 14.975,85.47 ccw(c13.295,85.47) 13.295,87.15 10.975,87.15 cw(c10.975,89.319) 8.806,89.319 8.806,89.544 cw(c12.106,89.544) 9.531,91.608 cw(c12.027,89.452) 9.536,91.614 cw(c12.027,89.452) 12.027,92.75 26.98,92.75 ccw(c26.98,95.145) 29.375,95.145 X1.8
GND: HL1.4 HL2.4 HL3.4 HL4.4 HL5.4 HL6.4 HL7.4 HL8.4 HL9.4 HL10.4 HL11.4 HL12.4 HL13.4 HL14.4 HL15.4 HL16.4 HL17.4 HL18.4 HL19.4 HL20.4 HL21.4 HL22.4 HL23.4 HL24.4 X1.0 X1.1 X1.2 X2.3 X3.4 С1.1 С2.1 С3.1 С4.1 С5.1 С6.1 С7.1 С8.1 С9.1 С10.1 С11.1 С12.1 С13.1 С14.1 С15.1 С16.1 С17.1 С18.1 С19.1 С20.1 С21.1 С22.1 С23.1 С24.1 | length 38.8
  Top Layer w0.381: HL21.4 2.804,8.84 ccw(c2.804,10.001) С21.1 ; HL20.4 2.804,15.016 ccw(c2.804,16.177) С20.1 ; HL19.4 2.804,21.292 ccw(c2.804,22.453) С19.1 ; HL18.4 2.804,27.568 ccw(c2.804,28.729) С18.1 ; HL17.4 2.804,33.844 ccw(c2.804,35.005) С17.1 ; HL16.4 2.804,40.12 ccw(c2.804,41.281) С16.1 ; HL15.4 2.804,46.396 ccw(c2.804,47.557) С15.1 ; HL14.4 2.804,52.672 ccw(c2.804,53.833) С14.1 ; HL13.4 2.804,58.948 ccw(c2.804,60.109) С13.1 ; HL12.4 2.804,65.224 ccw(c2.804,66.385) С12.1 ; HL11.4 2.804,71.5 ccw(c2.804,72.661) С11.1 ; HL10.4 2.804,77.776 ccw(c2.804,78.937) С10.1 ; HL9.4 2.804,84.052 ccw(c2.804,85.213) С9.1 ; HL8.4 2.804,90.328 ccw(c2.804,91.489) С8.1 ; HL7.4 2.804,96.604 ccw(c2.804,97.765) С7.1 ; HL6.4 2.804,102.88 ccw(c2.804,104.041) С6.1 ; HL5.4 2.804,109.156 ccw(c2.804,110.317) С5.1 ; HL4.4 2.804,115.332 ccw(c2.804,116.493) С4.1 ; HL3.4 3.367,120.053 3.698,119.685 3.699,119.684 ccw(c3.981,119.94) 3.896,119.569 4.314,119.472 С3.1 ; HL22.4 5.238,4.954 5.55,5.3 5.629,5.379 ccw(c5.053,5.956) С22.1 ; HL2.4 7.356,122.793 7.451,122.44 ; 7.451,122.439 ccw(c7.819,122.539) 7.537,122.282 7.939,121.84 С2.1 ; HL23.4 9.796,3.245 9.925,3.725 9.925,4.082 ccw(c9.382,4.082) С23.1 ; HL1.4 11.882,123.829 11.938,123.37 11.938,123.369 ccw(c12.316,123.417) 12.005,123.197 12.28,122.807 С1.1 ; С24.1 cw(c13.605,3.172) 14.45,3.172 14.45,3.05 14.384,2.556 HL24.4
  other v1: 15.15,99.85 33.875,99.925 18.55,102.85 29.2,103.8 31.925,103.9
LED_DATA: HL1.1 X1.6 | length 37.1
  Top Layer w0.381: HL1.1 14.332,109.779 ccw(c17.935,109.779) 17.935,106.175 24.45,106.175 cw(c24.45,103.75) 26.875,103.75 X1.6
NetHL1_3: HL1.3 HL2.1 | length 4.7
  Top Layer w0.381: HL2.1 9.694,123.853 9.631,124.391 cw(c10.063,124.44) 9.978,124.865 10.229,124.915 10.374,124.944 cw(c10.447,124.571) 10.398,124.948 12.172,125.176 ; 12.173,125.176 cw(c12.221,124.798) 12.599,124.845 12.625,124.634 HL1.3@12.675,124.25
NetHL2_3: HL2.3 HL3.1 | length 5.1
  Top Layer w0.381: HL3.1 4.995,122.021 4.806,122.773 cw(c5.176,122.866) 5.014,123.211 5.048,123.226 6.163,123.75 cw(c6.325,123.406) 6.227,123.774 6.228,123.774 7.484,124.104 ; 7.485,124.104 cw(c7.581,123.735) 7.949,123.834 7.986,123.696 HL2.3
NetHL3_3: HL3.3 HL4.1 | length 6
  Top Layer w0.381: 1.265,118.34 1.26,118.304 1.258,118.292 ccw(c1.634,118.233) 1.633,117.852 1.746,117.852 HL4.1 ; 1.265,118.341 1.271,118.376 ; 1.271,118.376 1.277,118.411 ; 1.277,118.412 1.284,118.449 1.29,118.482 1.295,118.513 ccw(c0.798,118.605) 1.296,118.517 1.304,118.559 1.312,118.6 1.32,118.641 1.328,118.682 ; 1.328,118.682 1.336,118.722 1.345,118.762 cw(c1.718,118.683) 1.345,118.764 1.354,118.803 1.363,118.843 ; 1.363,118.844 1.372,118.884 1.381,118.923 1.39,118.962 1.4,119.002 1.41,119.04 1.42,119.079 1.429,119.117 1.44,119.155 1.45,119.192 1.461,119.231 1.471,119.266 cw(c1.837,119.161) 1.471,119.268 1.484,119.311 1.496,119.353 ; 1.497,119.354 1.509,119.394 cw(c1.873,119.283) 1.51,119.397 1.525,119.444 ; 1.525,119.445 1.54,119.491 cw(c1.902,119.374) 1.54,119.493 1.556,119.54 1.57,119.581 cw(c1.93,119.457) 1.571,119.583 1.586,119.627 1.602,119.674 1.619,119.72 1.638,119.771 cw(c1.995,119.637) 1.639,119.772 1.658,119.822 cw(c2.013,119.684) 1.659,119.824 1.68,119.878 cw(c2.034,119.737) 1.681,119.88 1.704,119.938 cw(c2.057,119.794) 1.706,119.942 1.73,119.999 cw(c2.081,119.851) 1.731,120.002 1.756,120.059 cw(c2.105,119.906) 1.757,120.062 1.787,120.128 cw(c2.134,119.971) 1.789,120.133 1.825,120.209 cw(c2.169,120.047) 1.826,120.212 1.86,120.281 cw(c2.202,120.115) 1.862,120.286 1.886,120.334 cw(c2.226,120.161) 1.901,120.36 2.204,120.854 2.332,121.063 cw(c6.691,117.887) 2.392,121.143 2.448,121.216 cw(c2.749,120.983) 2.451,121.22 2.5,121.281 cw(c2.798,121.043) 2.503,121.285 2.559,121.353 cw(c2.853,121.11) 2.562,121.356 2.611,121.414 cw(c2.901,121.167) 2.613,121.417 2.637,121.444 cw(c2.925,121.194) 3.201,121.457 3.508,121.134 HL3.3
NetHL4_3: HL4.3 HL5.1 | length 6.1
  Top Layer w0.381: HL5.1 1.549,111.676 cw(c1.549,112.075) 1.15,112.075 1.15,115.791 cw(c1.531,115.791) 1.531,116.172 HL4.3
NetHL5_3: HL5.3 HL6.1 | length 6.2
  Top Layer w0.381: HL6.1 1.575,105.4 cw(c1.575,105.825) 1.15,105.825 1.15,109.615 cw(c1.531,109.615) 1.531,109.996 HL5.3
NetHL6_3: HL6.3 HL7.1 | length 6.2
  Top Layer w0.381: HL7.1 1.575,99.124 cw(c1.575,99.549) 1.15,99.549 1.15,103.339 cw(c1.531,103.339) 1.531,103.72 HL6.3
NetHL7_3: HL7.3 HL8.1 | length 6.2
  Top Layer w0.381: HL8.1 1.575,92.848 cw(c1.575,93.273) 1.15,93.273 1.15,97.063 cw(c1.531,97.063) 1.531,97.444 HL7.3
NetHL8_3: HL8.3 HL9.1 | length 6.2
  Top Layer w0.381: HL9.1 1.575,86.572 cw(c1.575,86.997) 1.15,86.997 1.15,90.787 cw(c1.531,90.787) 1.531,91.168 HL8.3
NetHL9_3: HL9.3 HL10.1 | length 6.2
  Top Layer w0.381: HL10.1 1.575,80.296 cw(c1.575,80.721) 1.15,80.721 1.15,84.511 cw(c1.531,84.511) 1.531,84.892 HL9.3
NetHL10_3: HL10.3 HL11.1 | length 6.2
  Top Layer w0.381: HL11.1 1.575,74.02 cw(c1.575,74.445) 1.15,74.445 1.15,78.235 cw(c1.531,78.235) 1.531,78.616 HL10.3
NetHL11_3: HL11.3 HL12.1 | length 6.2
  Top Layer w0.381: HL12.1 1.575,67.744 cw(c1.575,68.169) 1.15,68.169 1.15,71.959 cw(c1.531,71.959) 1.531,72.34 HL11.3
NetHL12_3: HL12.3 HL13.1 | length 6.2
  Top Layer w0.381: HL13.1 1.575,61.468 cw(c1.575,61.893) 1.15,61.893 1.15,65.683 cw(c1.531,65.683) 1.531,66.064 HL12.3
NetHL13_3: HL13.3 HL14.1 | length 6.2
  Top Layer w0.381: HL14.1 1.575,55.192 cw(c1.575,55.617) 1.15,55.617 1.15,59.407 cw(c1.531,59.407) 1.531,59.788 HL13.3
NetHL14_3: HL14.3 HL15.1 | length 6.2
  Top Layer w0.381: HL15.1 1.575,48.916 cw(c1.575,49.341) 1.15,49.341 1.15,53.131 cw(c1.531,53.131) 1.531,53.512 HL14.3
NetHL15_3: HL15.3 HL16.1 | length 6.2
  Top Layer w0.381: HL16.1 1.575,42.64 cw(c1.575,43.065) 1.15,43.065 1.15,46.855 cw(c1.531,46.855) 1.531,47.236 HL15.3
NetHL16_3: HL16.3 HL17.1 | length 6.2
  Top Layer w0.381: HL17.1 1.575,36.364 cw(c1.575,36.789) 1.15,36.789 1.15,40.579 cw(c1.531,40.579) 1.531,40.96 HL16.3
NetHL17_3: HL17.3 HL18.1 | length 6.2
  Top Layer w0.381: HL18.1 1.575,30.088 cw(c1.575,30.513) 1.15,30.513 1.15,34.303 cw(c1.531,34.303) 1.531,34.684 HL17.3
NetHL18_3: HL18.3 HL19.1 | length 6.2
  Top Layer w0.381: HL19.1 1.575,23.812 cw(c1.575,24.237) 1.15,24.237 1.15,28.027 cw(c1.531,28.027) 1.531,28.408 HL18.3
NetHL19_3: HL19.3 HL20.1 | length 6.2
  Top Layer w0.381: HL20.1 1.575,17.536 cw(c1.575,17.961) 1.15,17.961 1.15,21.751 cw(c1.531,21.751) 1.531,22.132 HL19.3
NetHL20_3: HL20.3 HL21.1 | length 6.1
  Top Layer w0.381: HL21.1 1.531,11.36 cw(c1.531,11.741) 1.15,11.741 1.15,15.475 cw(c1.531,15.475) 1.531,15.856 HL20.3
NetHL21_3: HL21.3 HL22.1 | length 6
  Top Layer w0.381: 1.179,9.032 1.182,9.001 1.185,8.97 1.188,8.939 1.192,8.908 1.195,8.878 1.199,8.84 1.204,8.802 1.209,8.764 1.213,8.727 1.218,8.689 1.223,8.652 1.228,8.615 1.233,8.578 1.238,8.541 1.244,8.505 1.249,8.469 1.255,8.432 1.261,8.397 ; 1.179,9.032 1.176,9.063 1.173,9.094 1.17,9.126 1.167,9.157 1.164,9.189 1.161,9.22 1.159,9.252 1.158,9.269 cw(c1.537,9.299) 1.537,9.68 HL21.3 ; 1.261,8.396 1.266,8.361 1.272,8.325 1.278,8.29 1.285,8.254 1.291,8.219 1.297,8.184 1.304,8.15 1.31,8.115 1.317,8.081 1.325,8.039 1.334,7.999 1.342,7.958 1.351,7.917 1.36,7.878 1.369,7.838 1.378,7.799 1.387,7.759 1.397,7.72 1.406,7.681 1.416,7.643 1.426,7.604 1.436,7.566 1.446,7.528 1.457,7.491 1.467,7.454 1.48,7.411 1.493,7.366 1.506,7.324 1.519,7.283 1.534,7.234 1.55,7.186 1.564,7.145 1.578,7.104 ; 1.578,7.104 1.594,7.057 1.61,7.011 ccw(c1.969,7.141) 1.611,7.01 1.627,6.966 ; 1.628,6.965 1.647,6.914 ccw(c2.003,7.05) 1.647,6.913 1.667,6.864 1.689,6.808 ccw(c2.042,6.951) 1.689,6.807 1.714,6.747 ccw(c2.066,6.893) 1.715,6.745 1.739,6.687 ccw(c2.089,6.837) 1.74,6.685 1.768,6.623 ccw(c2.116,6.777) 1.769,6.62 1.802,6.548 ccw(c2.148,6.707) 1.803,6.545 1.814,6.522 ccw(c2.157,6.687) 1.818,6.513 ; 1.818,6.513 1.998,6.165 ccw(c2.336,6.342) 2.003,6.156 2.004,6.154 ccw(c6.633,8.78) 2.102,5.989 ccw(c2.425,6.191) 2.7,5.927 2.883,6.12 HL22.1
NetHL22_3: HL22.3 HL23.1 | length 5.2
  Top Layer w0.381: 4.18,4.161 4.378,3.983 4.782,3.619 ccw(c5.036,3.903) 4.855,3.568 4.864,3.563 4.875,3.557 ccw(c5.054,3.893) 4.878,3.556 5.145,3.418 ccw(c5.319,3.757) 5.163,3.409 6.212,2.941 ccw(c6.366,3.289) 6.228,2.934 6.346,2.888 ccw(c6.59,3.519) HL23.1@7.267,3.519 ; 4.18,4.161 cw(c4.718,4.754) 3.968,4.475 cw(c4.325,4.606) 4.034,4.852 4.146,4.983 HL22.3
NetHL23_3: HL23.3 HL24.1 | length 4.7
  Top Layer w0.381: HL23.3 8.807,2.776 8.744,2.513 ccw(c9.115,2.426) 9.024,2.056 9.033,2.054 9.101,2.037 9.169,2.021 9.251,2.002 9.334,1.983 9.417,1.964 9.5,1.945 9.583,1.927 9.852,1.869 9.866,1.866 9.906,1.857 ; 9.907,1.857 10.453,1.749 ccw(c10.527,2.122) 10.456,1.748 10.529,1.734 10.559,1.729 ccw(c10.628,2.103) 10.571,1.727 11.312,1.616 ccw(c11.367,1.993) 11.744,1.937 11.778,2.162 HL24.1
SERVO_DATA: X1.7 X2.1 | length 110
  Top Layer w0.381: 9.148,91.938 ccw(c9.531,91.608) 9.135,91.923 ccw(c12.106,89.544) 8.3,89.544 8.3,89.319 ccw(c10.975,89.319) 10.975,86.644 13.298,86.644 cw(c13.292,84.636) 13.304,86.644 cw(c13.295,85.47) 14.469,85.47 14.469,40.338 cw(c14.088,40.338) 14.088,39.957 10.956,39.957 ccw(c10.956,37.553) 8.58,37.918 ccw(c9.456,37.779) 8.569,37.779 8.569,35.825 8.569,28.927 ccw(c10.697,28.927) 8.569,28.915 8.575,27.832 cw(c8.194,27.83) 8.575,27.83 ccw(c11.64,27.83) 11.64,24.765 X2.1 ; 9.148,91.939 cw(c12.027,89.452) 12.027,93.256 26.98,93.256 ccw(c26.98,95.145) 27.765,93.427 ccw(c27.605,93.773) 27.942,93.595 ccw(c26.541,94.334) 28.125,94.334 X1.7
USB_DN: X1.4 X3.2 | length 30.8
  Top Layer w0.381: X3.2 7.03,91.556 cw(c10.199,91.556) 10.199,94.725 23.134,94.725 23.136,94.725 ccw(c23.136,95.988) 24.398,96.031 cw(c24.779,96.043) 24.398,96.036 X1.4
USB_DP: X1.5 X3.3 | length 31.9
  Top Layer w0.381: X3.3 7.762,83.808 cw(c8.031,84.078) 7.65,84.078 7.65,91.56 cw(c10.215,91.56) 10.215,94.125 23.153,94.125 ccw(c23.153,96.597) 25.625,96.597 X1.5
pads on no net: HL24.3

## Polygon pours and split planes (outlines as drawn)
GND on Top Layer "GND_L01_P001" (solid, remove dead copper, pour order 1): 0,0 0,126.725 35.05,126.725 35.05,0
GND on Bottom Layer "GND_L02_P000" (solid, remove dead copper, pour order 0): 0,0 0,126.725 35.05,126.725 35.05,0

## Keep-outs
Keep-Out Layer:
  the board outline again, w0.013

## Silkscreen, mask and mechanical layers (free items; w line width, h text height)
Top Overlay:
  lines w0.25: 19.85,97.355 19.882,97.323 19.882,94.012 30.112,94.012 30.112,97.317 30.15,97.355
  text "GND" at 21.259,94.1 h1.52 r90
  text "GND" at 22.509,94.1 h1.52 r90
  text "+5В" at 23.759,94.1 h1.52 r90
  text "DN" at 25.009,94.1 h1.52 r90
  text "DP" at 26.259,94.1 h1.52 r90
  text "LED" at 27.509,94.1 h1.52 r90
  text "7,2В" at 30.009,94.1 h1.52 r90
  text "PWM" at 28.759,94.094 h1.45 r90
  text "GND" at 16.291,29.373 h1.52
  text "VCC" at 16.326,26.833 h1.52
  text "PWM" at 16.194,24.293 h1.52
Bottom Overlay:
  text "GND" at 12.597,80.884 h1.52 r90
  text "+5В" at 4.969,80.693 h1.52 r90
  text "DN" at 7.517,80.431 h1.52 r90
  text "DP" at 10.057,80.419 h1.52 r90
Mechanical 1:
  drawing of 677 lines, arcs and shapes, not listed